# EAGLE board fuenteSimetrica_hoy (EAGLE 7.5.0)
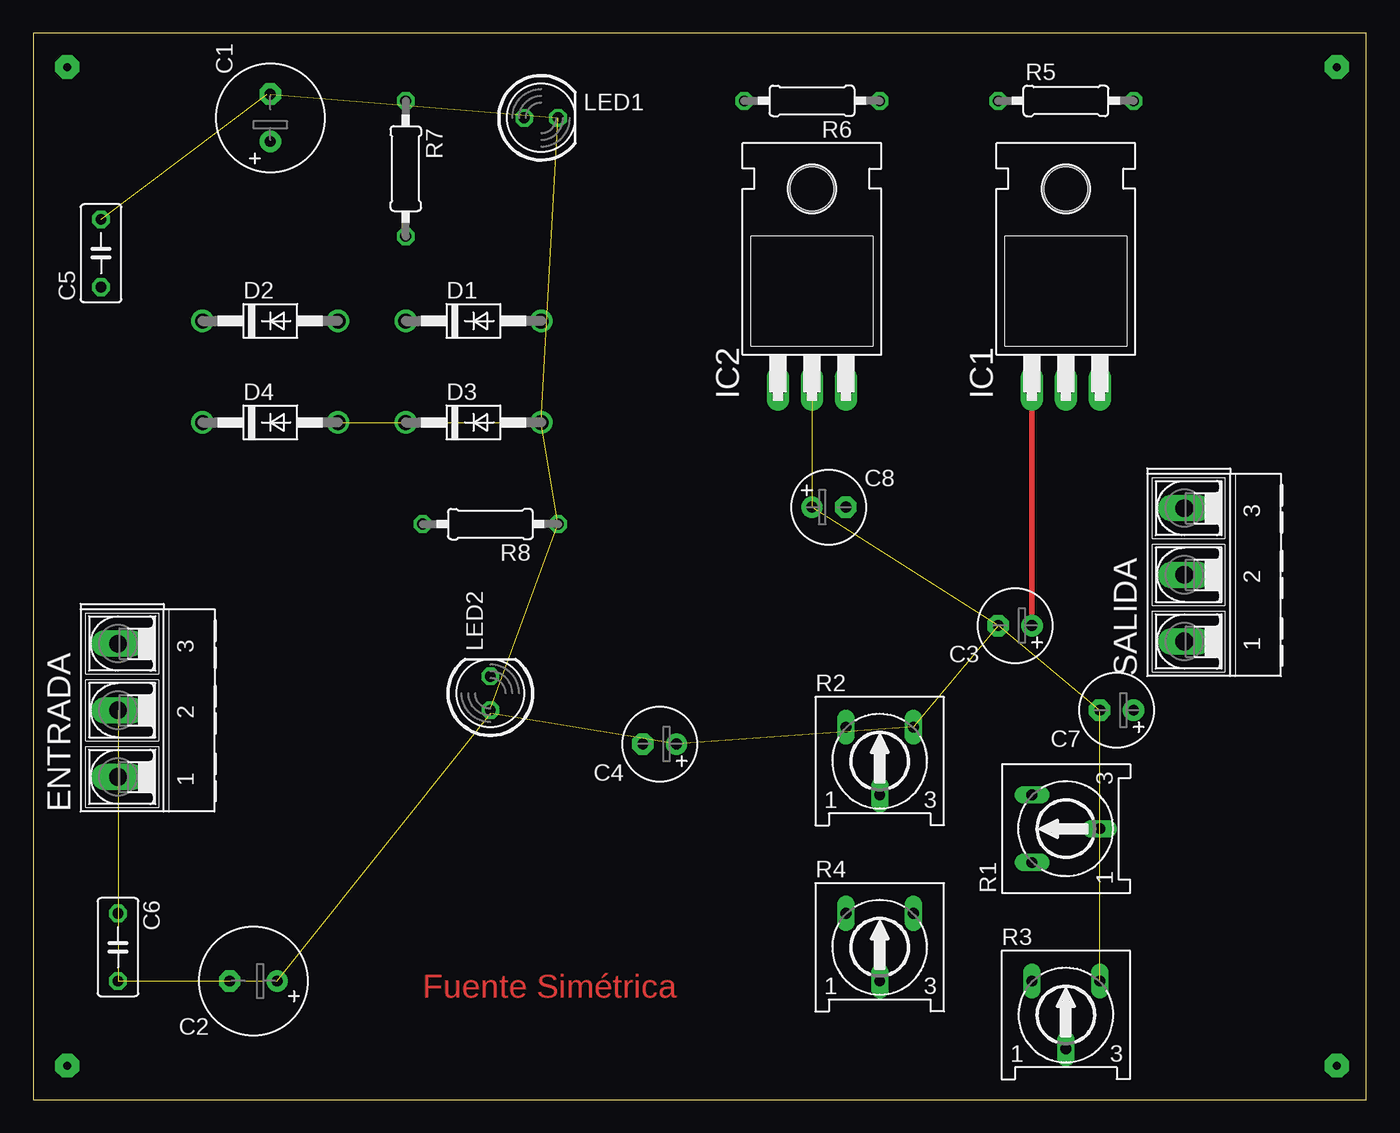
[diagram p0: board, top side]
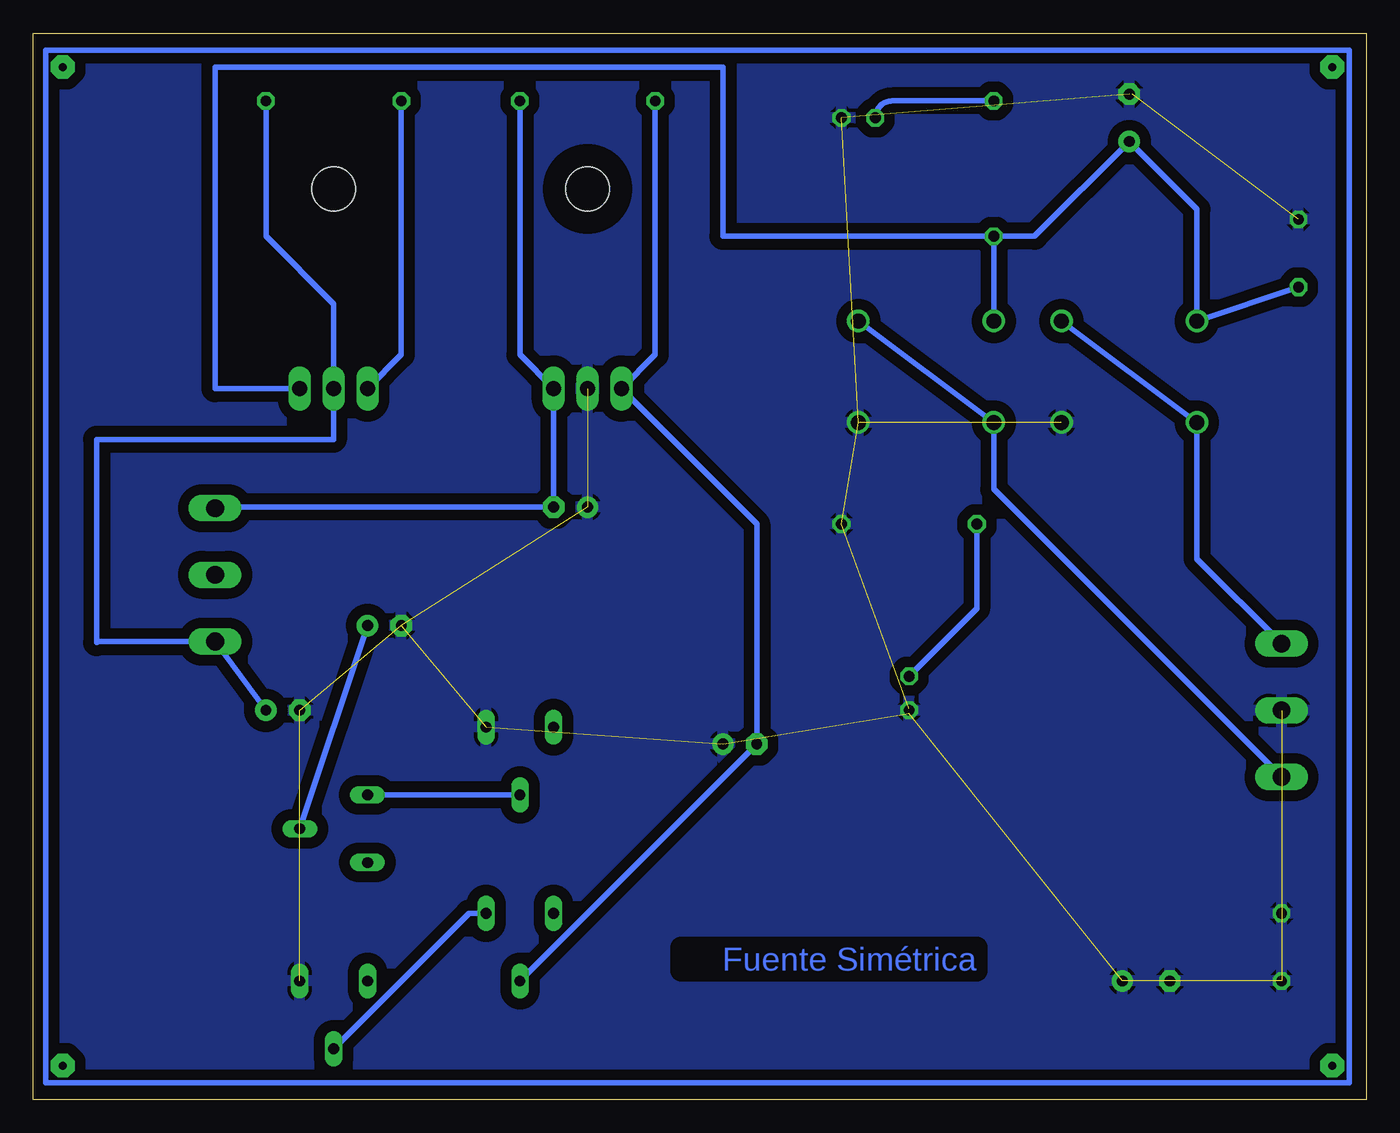
[diagram p1: board, bottom side, seen from below]

Size 100 x 80 mm. Coordinates in mm from the lower left corner, seen from the top.
Outline: 0,0 100,0 100,80 0,80 0,0
Copper layers (1*16): Top 0.035mm / dielectric 1.5mm / Bottom 0.035mm
Design rules "default *": minimum track width 10mil, minimum drill 24mil, track to track 10mil, track to pad 10mil, pad to pad 10mil, via to via 10mil, smd to smd 10mil, copper to edge 30mil, drill to drill 10mil, minimum pad ring 10mil, minimum via ring 8mil, stop-mask expansion 4mil, vias tented up to drill 0mil, thermal gap 10mil
Net classes: 0 fina: width 0.508 mm; 1 mediana: width 1.27 mm; 2 gruesa: width 2.54 mm

## Footprints (pad centres in the part's own frame; a part is rotated, then mirrored left to right if it is on the bottom)
E3,5-8 = drill 0.813 pad 1.6: + -1.778,0 | drill 0.813 pad 1.6 octagon: - 1.778,0
E2,5-6 = drill 0.813 pad 1.6: + -1.27,0 | drill 0.813 pad 1.6 octagon: - 1.27,0
C050-030X075 = drill 0.813 octagon: 1 -2.54,0; 2 2.54,0
DO41-10 = drill 1.118: A 5.08,0; C -5.08,0
AK500/3-H = drill 1.321 long: 1 -5.004,0; 2 0,0; 3 5.004,0
TO220H = drill 1.118 long: 1 -2.54,-10.16; 2 0,-10.16; 3 2.54,-10.16 | hole 3.302: 0,4.826
LED5MM = drill 0.813 octagon: A -1.27,0; K 1.27,0
RS3 = drill 0.813 long: A -2.54,2.54; E 2.54,2.54; S 0,-2.54
0207/10 = drill 0.813 octagon: 1 -5.08,0; 2 5.08,0

## Placement (x,y rotation side)
C1  1000uF  [E3,5-8]  17.78,73.66 90 top
C2  1000uF  [E3,5-8]  16.51,8.89 180 top
C3  1uF  [E2,5-6]  73.66,35.56 180 top
C4  1uF  [E2,5-6]  46.99,26.67 180 top
C5  10nF  [C050-030X075]  5.08,63.5 90 top
C6  10nF  [C050-030X075]  6.35,11.43 270 top
C7  10uF  [E2,5-6]  81.28,29.21 180 top
C8  10uF  [E2,5-6]  59.69,44.45 0 top
D1  1N4004  [DO41-10]  33.02,58.42 0 top
D2  1N4004  [DO41-10]  17.78,58.42 0 top
D3  1N4004  [DO41-10]  33.02,50.8 0 top
D4  1N4004  [DO41-10]  17.78,50.8 0 top
ENTRADA  [AK500/3-H]  6.35,29.21 90 top
IC1  317T  [TO220H]  77.47,63.5 0 top
IC2  337T  [TO220H]  58.42,63.5 0 top
LED1  +vcc  [LED5MM]  38.1,73.66 0 top
LED2  -vcc  [LED5MM]  34.29,30.48 90 top
R1  10KOhm  [RS3]  77.47,20.32 90 top
R2  470KOhm  [RS3]  63.5,25.4 0 top
R3  470KOhm  [RS3]  77.47,6.35 0 top
R4  10KOhm  [RS3]  63.5,11.43 0 top
R5  220Ohm  [0207/10]  77.47,74.93 0 top
R6  220Ohm  [0207/10]  58.42,74.93 180 top
R7  330Ohm  [0207/10]  27.94,69.85 270 top
R8  330Ohm  [0207/10]  34.29,43.18 180 top
SALIDA  [AK500/3-H]  86.36,39.37 90 top

## Library data of the parts
C1-C8 R5-R8 = rcl
D1-D4 = diode
ENTRADA SALIDA = con-ptr500; OC_FARNELL: unknown; OC_NEWARK: unknown
IC1 IC2 = linear
LED1 LED2 = led
R1-R4 = pot

## Nets
GND: C1.- C2.+ C2.- C3.- C4.+ C5.2 C6.1 C6.2 C7.- C8.+ D3.A D4.A ENTRADA.2 IC2.2 LED1.K LED2.A R2.E R3.E R8.1
N$1: D1.A D3.C ENTRADA.1
N$2: C1.+ C5.1 D1.C D2.C IC1.3 R7.2
N$3: D2.A D4.C ENTRADA.3
N$4: LED1.A R7.1
N$5: C7.+ IC1.2 R5.2 SALIDA.1
N$7: R1.E R2.S
N$8: LED2.K R8.2
N$9: C3.+ IC1.1 R1.S R5.1
N$10: C4.- IC2.1 R4.S R6.2
N$11: R3.S R4.E
N$12: C8.- IC2.3 R6.1 SALIDA.3

## Tracks (layer width: path | path; a pad name or v marks a point on that pad's centre or on a via)
GND  (18 unrouted)
  Top 0.508: 34.29,29.34 LED2.A 34.29,28.96
  Bottom 0.508: 17.53,75.44 C1.-
  pour Bottom (isolate 0.813): 1.27,78.74 99.06,78.74 99.06,1.27 1.27,1.27
N$1
  Bottom 0.406: D1.A D3.C 27.94,45.8 ENTRADA.1
N$2
  Bottom 0.406: C5.1 D2.C 12.7,66.8 C1.+ 24.89,64.77 R7.2 | IC1.3 86.36,53.34 86.36,77.47 48.26,77.47 48.26,64.77 R7.2 | R7.2 D1.C
N$3
  Bottom 0.406: D2.A D4.C 12.7,40.56 ENTRADA.3
N$4
  Top 0.508: 36.58,73.91 LED1.A
  Bottom 0.406: R7.1 35.56,74.93 arc-90 LED1.A
N$5
  Bottom 0.406: C7.+ SALIDA.1 95.17,34.37 95.25,34.29 95.25,49.53 82.55,49.53 81.28,49.53 77.47,49.53 IC1.2 77.47,59.69 82.55,64.77 R5.2
N$7
  Bottom 0.406: R2.S R1.E
N$8
  Bottom 0.406: R8.2 29.21,36.83 LED2.K
N$9
  Top 0.406: IC1.1 C3.+
  Bottom 0.406: C3.+ R1.S | R5.1 72.39,55.88 IC1.1
N$10
  Bottom 0.406: R4.S C4.- 45.72,43.18 IC2.1 53.34,55.88 R6.2
N$11
  Bottom 0.406: R4.E 67.31,13.97 R3.S
N$12
  Bottom 0.406: R6.1 63.5,55.88 IC2.3 C8.- 86.36,44.45 SALIDA.3
S$1  (via drill 0.6 pad 1.78)
  other vias: 2.54,77.47
S$2  (via drill 0.6 pad 1.78)
  other vias: 97.79,77.47
S$3  (via drill 0.6 pad 1.78)
  other vias: 97.79,2.54
S$4  (via drill 0.6 pad 1.78)
  other vias: 2.54,2.54
S$5
  Bottom 0.406: 1.27,78.74 99.06,78.74 99.06,1.27 1.27,1.27 1.27,78.74

## Text on the board
Top: Fuente Simétrica
Bottom: Fuente Simétrica